# EAGLE board main_board (EAGLE 9.6.2)
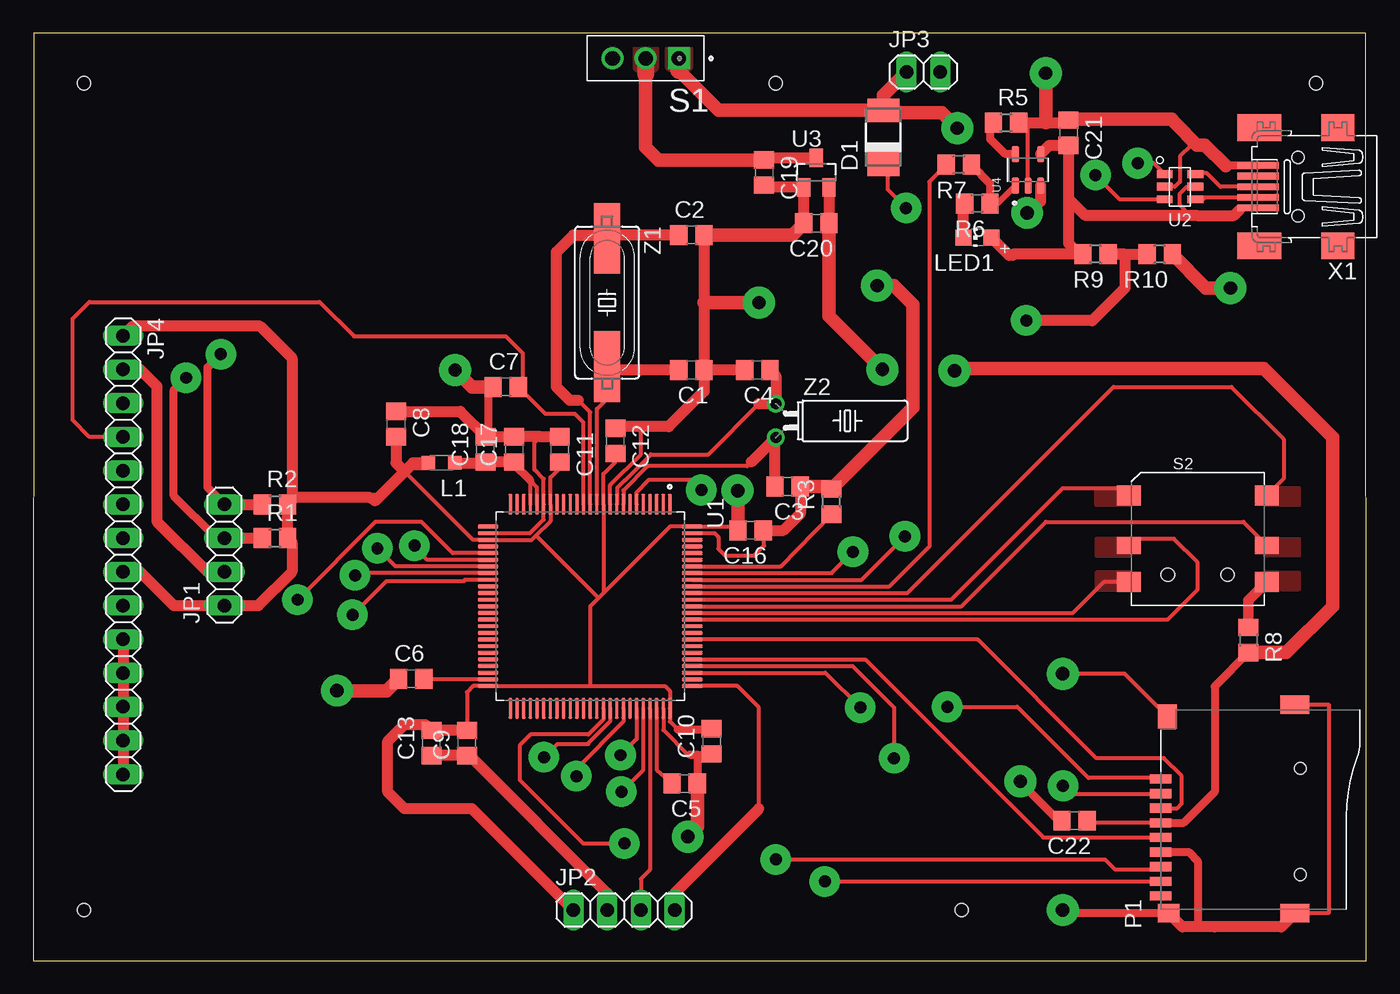
[diagram p0: board, top side]
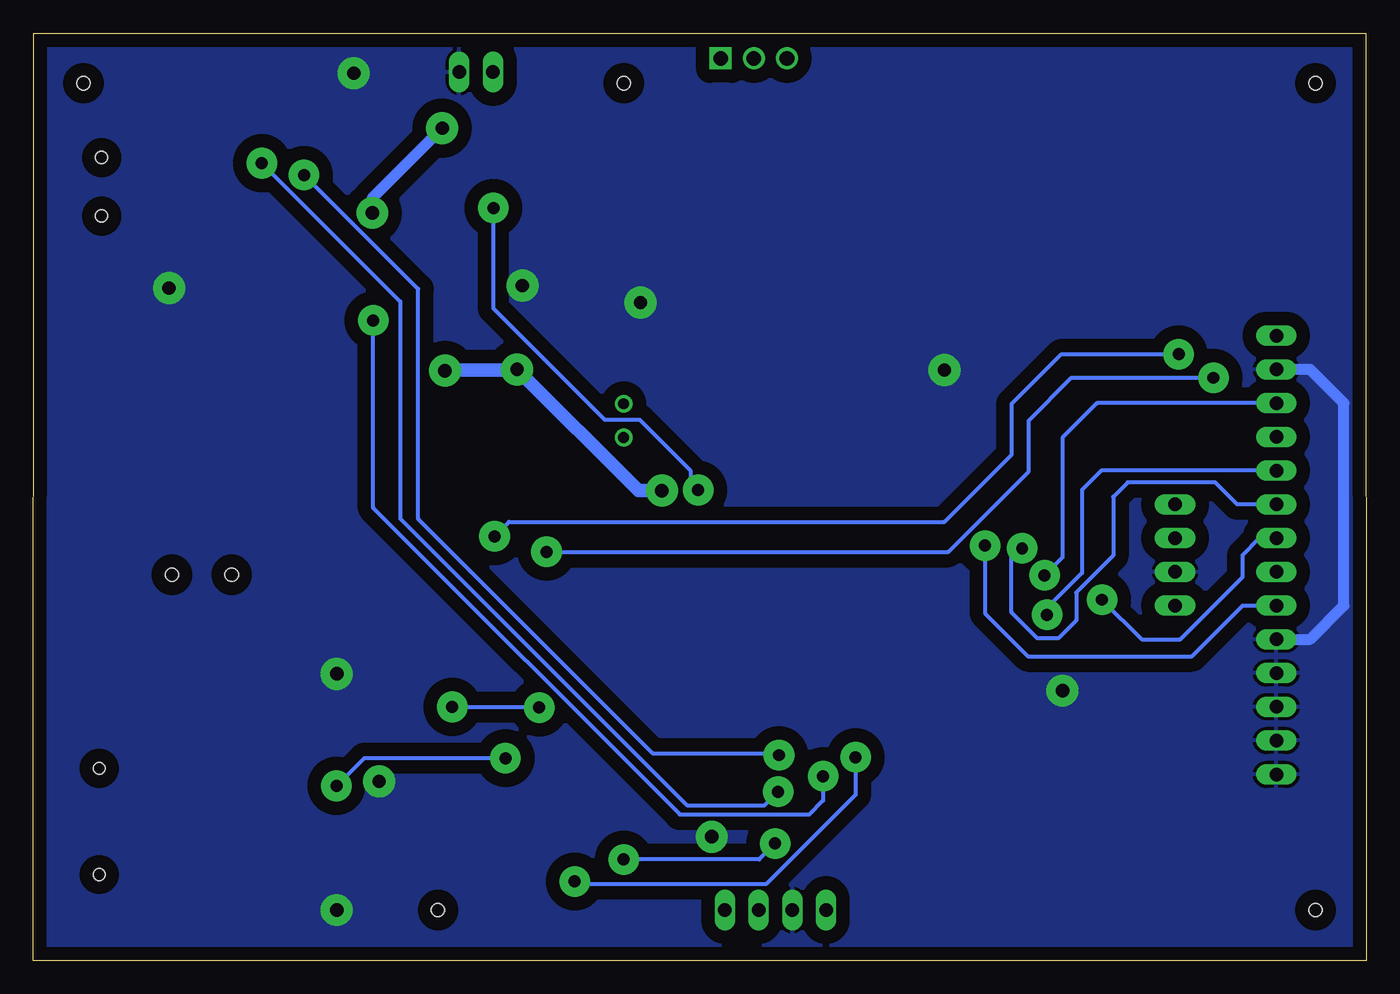
[diagram p1: board, bottom side, seen from below]

Size 100.31 x 69.8 mm. Coordinates in mm from the lower left corner, seen from the top.
Outline: 0,0 100.31,0 100.26,69.8 0.04,69.79 0,0
Copper layers (1*16): Top 0.035mm / dielectric 1.5mm / Bottom 0.035mm
Design rules "default *": minimum track width 6mil, minimum drill 0.35mm, track to track 6mil, track to pad 6mil, pad to pad 6mil, via to via 6mil, smd to smd 6mil, copper to edge 40mil, drill to drill 6mil, minimum pad ring 10mil, minimum via ring 0.7mm, stop-mask expansion 4mil, vias tented up to drill 0mil, thermal gap 10mil
Net classes: 0 default: width 0.3 mm, drill 0.9 mm; 1 power: width 0.3 mm, drill 1 mm
Holes 1 mm at 3.81,66.04 3.81,3.81 96.52,66.04 69.85,3.81 55.88,66.04

## Footprints (pad centres in the part's own frame; a part is rotated, then mirrored left to right if it is on the bottom)
C0805 = smd 1.3 x 1.5: 1 -0.95,0; 2 0.95,0
DO-214AC = smd 1.8 x 2.4: A 2.025,0; C -2.025,0
1X04 = drill 1.016 long: 1 -3.81,0; 2 -1.27,0; 3 1.27,0; 4 3.81,0
1X02 = drill 1.016 long: 1 -1.27,0; 2 1.27,0
1X14 = drill 1.016 long: 1 -16.51,0; 2 -13.97,0; 3 -11.43,0; 4 -8.89,0; 5 -6.35,0; 6 -3.81,0; 7 -1.27,0; 8 1.27,0; 9 3.81,0; 10 6.35,0; 11 8.89,0; 12 11.43,0; 13 13.97,0; 14 16.51,0
L2012C = smd 1 x 1: 1 -1,0; 2 1,0
CHIP-LED0805 = smd 1.2 x 1.2: A 0,-1.05; C 0,1.05
SUNTECH_ST-TF-003A = smd 0.7 x 1.6: 1 3.52,5.33; 2 2.42,5.33; 3 1.32,5.33; 4 0.22,5.33; 5 -0.88,5.33; 6 -1.98,5.33; 7 -3.08,5.33; 8 -4.18,5.33; 9 -5.28,5.33 | smd 1.4 x 1.6: G1 -6.58,4.73 | smd 1.4 x 2.2: G2 -6.58,-4.77; G3 9.12,-4.77 | smd 1.8 x 1.4: G4 8.22,4.83 | hole 0.9: -3.68,-5.17; 4.32,-5.17
R0805 = smd 1.3 x 1.5: 1 -0.95,0; 2 0.95,0
SW_SSA12G = drill 1.1 square: 1 -2.5,0 | drill 1.1: 2 0,0; 3 2.5,0
SW6-3.25-10X10X8.6MM = smd 1.8 x 1.5: 1 -5.2,3.25; 3 -5.2,-3.25; 4 5.2,-3.25; 6 5.2,3.25 | smd 1.8 x 1.3: 2 -5.2,-0.5; 5 5.2,-0.5 | hole 1: -2.25,-2.7; 2.25,-2.7
QFP50P1600X1600X160-100N = smd 1.56 x 0.28: 1 -7.68,6; 2 -7.68,5.5; 3 -7.68,5; 4 -7.68,4.5; 5 -7.68,4; 6 -7.68,3.5; 7 -7.68,3; 8 -7.68,2.5; 9 -7.68,2; 10 -7.68,1.5; 11 -7.68,1; 12 -7.68,0.5; 13 -7.68,0; 14 -7.68,-0.5; 15 -7.68,-1; 16 -7.68,-1.5; 17 -7.68,-2; 18 -7.68,-2.5; 19 -7.68,-3; 20 -7.68,-3.5; 21 -7.68,-4; 22 -7.68,-4.5; 23 -7.68,-5; 24 -7.68,-5.5; 25 -7.68,-6; 51 7.68,-6; 52 7.68,-5.5; 53 7.68,-5; 54 7.68,-4.5; 55 7.68,-4; 56 7.68,-3.5; 57 7.68,-3; 58 7.68,-2.5; 59 7.68,-2; 60 7.68,-1.5; 61 7.68,-1; 62 7.68,-0.5; 63 7.68,0; 64 7.68,0.5; 65 7.68,1; 66 7.68,1.5; 67 7.68,2; 68 7.68,2.5; 69 7.68,3; 70 7.68,3.5; 71 7.68,4; 72 7.68,4.5; 73 7.68,5; 74 7.68,5.5; 75 7.68,6 | smd 0.28 x 1.56: 26 -6,-7.68; 27 -5.5,-7.68; 28 -5,-7.68; 29 -4.5,-7.68; 30 -4,-7.68; 31 -3.5,-7.68; 32 -3,-7.68; 33 -2.5,-7.68; 34 -2,-7.68; 35 -1.5,-7.68; 36 -1,-7.68; 37 -0.5,-7.68; 38 0,-7.68; 39 0.5,-7.68; 40 1,-7.68; 41 1.5,-7.68; 42 2,-7.68; 43 2.5,-7.68; 44 3,-7.68; 45 3.5,-7.68; 46 4,-7.68; 47 4.5,-7.68; 48 5,-7.68; 49 5.5,-7.68; 50 6,-7.68; 76 6,7.68; 77 5.5,7.68; 78 5,7.68; 79 4.5,7.68; 80 4,7.68; 81 3.5,7.68; 82 3,7.68; 83 2.5,7.68; 84 2,7.68; 85 1.5,7.68; 86 1,7.68; 87 0.5,7.68; 88 0,7.68; 89 -0.5,7.68; 90 -1,7.68; 91 -1.5,7.68; 92 -2,7.68; 93 -2.5,7.68; 94 -3,7.68; 95 -3.5,7.68; 96 -4,7.68; 97 -4.5,7.68; 98 -5,7.68; 99 -5.5,7.68; 100 -6,7.68
SOT-23-6L = smd 0.6 x 1.2: P$1 -0.95,-1.15; P$2 0,-1.15; P$3 0.95,-1.15; P$4 0.95,1.15; P$5 0,1.15; P$6 -0.95,1.15
SOT23 = smd 1 x 1.4: 1 -0.95,-1.1; 2 0.95,-1.1; 3 0,1.1
SOT95P280X100-5N = smd 1.24 x 0.55: 1 -1.185,0.95; 2 -1.185,0; 3 -1.185,-0.95; 4 1.185,-0.95; 5 1.185,0.95
32005-201 = smd 3.1 x 0.5: 1 3,1.6; 2 3,0.8; 3 3,0; 4 3,-0.8; 5 3,-1.6 | smd 2.5 x 2: M1 -3,-4.45; M2 -3,4.45 | smd 3.3 x 2: M3 2.9,4.45; M4 2.9,-4.45 | hole 0.9: 0,2.2; 0,-2.2
HC49UP = smd 5.334 x 1.93: 1 -4.826,0; 2 4.826,0
TC38H = drill 0.813: 1 -1.27,0; 2 1.27,0

## Placement (x,y rotation side)
C1  20p  [C0805]  49.53,44.45 180 top
C2  20p  [C0805]  49.53,54.61 0 top
C3  10p  [C0805]  56.77,35.69 180 top
C4  10p  [C0805]  54.48,44.45 180 top
C5  2.2u  [C0805]  49.02,13.34 180 top
C6  2.2u  [C0805]  28.45,21.21 0 top
C7  100n  [C0805]  35.56,43.18 0 top
C8  100n  [C0805]  27.3,40.39 270 top
C9  100n  [C0805]  32.64,16.38 90 top
C10  100n  [C0805]  51.05,16.51 90 top
C11  100n  [C0805]  39.62,38.48 270 top
C12  100n  [C0805]  43.81,39.12 270 top
C13  1u  [C0805]  29.97,16.38 90 top
C16  100n  [C0805]  53.98,32.38 180 top
C17  100n  [C0805]  36.2,38.48 90 top
C18  1u  [C0805]  34.04,38.48 90 top
C19  1u  [C0805]  54.99,59.31 270 top
C20  1u  [C0805]  58.93,55.5 180 top
C21  1u  [C0805]  77.9,62.31 270 top
C22  100n  [C0805]  78.36,10.54 180 top
D1  RS1M  [DO-214AC]  63.97,61.96 90 top
JP1  I2C  [1X04]  14.39,30.53 90 top
JP2  SWD  [1X04]  44.45,3.81 0 top
JP3  BAT  [1X02]  66.98,66.88 0 top
JP4  LCD  [1X14]  6.77,30.53 270 top
L1  10uH  [L2012C]  30.73,37.47 180 top
LED1  RED  [CHIP-LED0805]  71.04,54.43 90 top
P1  ST-TF-003A  [SUNTECH_ST-TF-003A]  90.17,10.16 90 top
R1  2.2k  [R0805]  18.2,31.8 0 top
R2  2.2k  [R0805]  18.2,34.34 0 top
R3  10k  [R0805]  60.07,34.54 90 top
R5  10k  [R0805]  73.2,63.07 0 top
R6  1k  [R0805]  71.04,56.97 180 top
R7  1k  [R0805]  69.65,59.89 180 top
R8  1k  [R0805]  91.44,24.13 270 top
R9  10k  [R0805]  79.93,53.16 180 top
R10  20k  [R0805]  84.76,53.16 180 top
S1  [SW_SSA12G]  46.09,67.91 180 top
S2  INT-1500M90B  [SW6-3.25-10X10X8.6MM]  87.63,31.75 0 top
U1  STM32F407VGT6  [QFP50P1600X1600X160-100N]  41.91,26.67 270 top
U2  USBLC6-2  [SOT-23-6L]  86.28,58.24 270 top
U3  MCP1700T-3302E  [SOT23]  58.93,59.31 0 top
U4  LTC4054LES5-4.2#TRPBF  [SOT95P280X100-5N]  74.85,59.51 90 top
X1  MicroUSB-B  [32005-201]  95.17,58.24 180 top
Z1  8MHz  [HC49UP]  43.18,49.53 270 top
Z2  32768  [TC38H]  55.88,40.64 270 top

## Library data of the parts
C1-C13 C16-C22 = rcl; SPICEPREFIX: C
D1 = diode
JP1-JP4 = pinhead
L1 = rcl; SPICEPREFIX: L
LED1 = adafruit
P1 = ST-TF-003A; AVAILABILITY: Not in stock; DESCRIPTION: Micro SD Card Socket; MF: Suntech; MP: ST-TF-003A; PACKAGE: None; PRICE: None
R1-R3 R5-R10 = rcl; SPICEPREFIX: R
S1 = SSA12G; AVAILABILITY: In Stock; COMMENT: 1-1437575-5; DESCRIPTION: 2 Position SPDT Extended Top Actuator Through Hole Vertical Mount Slide Switch; MF: TE Connectivity; MP: SSA12G; PACKAGE: None; PRICE: None
S2 = int-1500m90b; AVAILABILITY: Not in stock; DESCRIPTION: Switch Tactile Square Plunger J-Bend 0.05A 12VDC 3.14N SMD T/R; MF: ALPS; MP: SKQUDBE010; PACKAGE: None; PRICE: None
U1 = STM32F407VGT6; AVAILABILITY: In Stock; DESCRIPTION: ARM® Cortex®-M4 STM32F4 Microcontroller IC 32-Bit 168MHz 1MB (1M x 8) FLASH 100-LQFP (14x14); MF: STMicroelectronics; MP: STM32F407VGT6; PACKAGE: LQFP-100 STMicroelectronics; PRICE: None; PURCHASE-URL: https://pricing.snapeda.com/search/part/STM32F407VGT6/?ref=eda
U2 = USBLC6-2; AVAILABILITY: In Stock; DESCRIPTION: 17V Clamp 5A (8/20µs) Ipp Tvs Diode Surface Mount SOT-23-6; MF: STMicroelectronics; MP: USBLC6-2; PACKAGE: SOT-563 STMicroelectronics; PRICE: None; PURCHASE-URL: https://pricing.snapeda.com/search/part/USBLC6-2/?ref=eda
U3 = linear
U4 = LTC4054LES5-4.2_TRPBF; AVAILABILITY: In Stock; DESCRIPTION: Battery Charger Li-Ion 10mA to 150mA 4.2V 5-Pin TSOT-23 T/R; MF: Analog Devices; MP: LTC4054LES5-4.2#TRPBF; PACKAGE: SOT-5 Analog Devices; PRICE: None; PURCHASE-URL: https://pricing.snapeda.com/search/part/LTC4054LES5-4.2#TRPBF/?ref=eda
X1 = con-cypressindustries; OC_FARNELL: unknown; OC_NEWARK: unknown
Z1 Z2 = crystal; OC_FARNELL: unknown; OC_NEWARK: unknown

## Nets
+5V [power]: C21.2 LED1.A R9.2 U2.P$5 U4.4 X1.1
BOOT0: R3.1 U1.94
BTN_0: S2.6 U1.90
BTN_1: S2.1 U1.89
BTN_2: S2.5 U1.88
BTN_3: S2.3 U1.87
BTN_4: S2.2 U1.86
BTN_COM: R8.1 S2.4
D+: U2.P$6 X1.3
D+_PROT: U1.71 U2.P$1
D-: U2.P$4 X1.2
D-_INT: U1.70 U2.P$3
GND [power]: C1.1 C2.2 C3.1 C4.2 C5.1 C6.1 C7.1 C8.1 C9.1 C10.1 C11.1 C12.1 C13.1 C16.1 C17.2 C18.2 C19.2 C20.2 C21.1 C22.2 JP1.2 JP2.2 JP3.2 JP4.2 JP4.10 JP4.11 JP4.12 JP4.13 JP4.14 P1.6 P1.G1 P1.G2 P1.G3 P1.G4 R3.2 R5.2 R10.1 U1.10 U1.20 U1.27 U1.74 U1.99 U2.P$2 U3.1 U4.2 X1.5
I2C_SCL: JP1.4 R2.1 U1.92
I2C_SDA: JP1.3 R1.1 U1.93
LCD_CS: JP4.3 U1.33
LCD_DC: JP4.5 U1.34
LCD_MISO: JP4.9 U1.31
LCD_MOSI: JP4.6 U1.32
LCD_SCK: JP4.7 U1.30
N$1: C1.2 U1.12 Z1.2
N$2: C2.1 U1.13 Z1.1
N$3: C4.1 U1.9 Z2.1
N$5: C6.2 U1.49
N$6: C5.2 U1.73
N$7: C19.1 S1.2 U3.3
N$8: R6.1 R7.1 U4.1
N$9: LED1.C R6.2
N$10: D1.C U1.6
N$11: C3.2 U1.8 Z2.2
NCHRG: R7.2 U1.91
NRST: C7.2 JP4.4 U1.14
PROG: R5.1 U4.5
SD_CLK: P1.5 U1.80
SD_CMD: P1.3 U1.83
SD_DAT0: P1.7 U1.65
SD_DAT1: P1.8 U1.66
SD_DAT2: P1.1 U1.78
SD_DAT3: P1.2 U1.79
SWCLK: JP2.4 U1.76
SWDIO: JP2.3 U1.72
VBAT+ [power]: D1.A JP3.1 S1.1 U4.3
VBUS: R9.1 R10.2 U1.68
VDD [power]: C8.2 C9.2 C10.2 C11.2 C12.2 C13.2 C16.2 C20.1 C22.1 JP1.1 JP2.1 JP4.1 JP4.8 L1.2 P1.4 R1.2 R2.2 R8.2 U1.11 U1.19 U1.28 U1.50 U1.75 U1.100 U3.2
VDDA [power]: C17.1 C18.1 L1.1 U1.21 U1.22

## Tracks (layer width: path | path; a pad name or v marks a point on that pad's centre or on a via)
+5V
  Top 0.3: 87.05,56.08 86.28,56.84 86.28,57.73 86.79,58.24 U2.P$5 | X1.1 92.05,56.52 90.78,56.52
  Top 0.61: 87.05,56.08 87.55,56.08 | 73.43,53.1 73.69,53.1 74.79,53.1
  Top 0.813: U4.4 76.46,61.36 C21.2 77.9,57.35 | 90.78,56.52 90.35,56.08 87.55,56.08 79.17,56.08 77.9,57.35 | LED1.A 73.43,53.1 | R9.2 78.74,53.16 | 78.74,53.16 73.7,53.16 73.69,53.1 | 77.9,57.35 77.9,54 78.74,53.16
BOOT0
  Top 0.3: U1.94 56.25,29.67 R3.1
BTN_0
  Top 0.3: U1.90 65.77,27.67 81.28,43.18 90.17,43.18 94.1,39.25 94.1,36.27 S2.6
  pour Top (no thermals): 92.71,35.56 95.25,35.56 95.25,34.29 92.71,34.29
BTN_1
  Top 0.3: U1.89 69.08,27.17 77.47,35.56 81.87,35.56 S2.1
  pour Top (no thermals): 82.55,34.29 80.01,34.29 80.01,35.56 82.55,35.56
BTN_2
  Top 0.3: U1.88 69.85,26.67 76.2,33.02 91.06,33.02 S2.5
  pour Top (no thermals): 92.71,31.75 95.25,31.75 95.25,30.48 92.71,30.48
BTN_3
  Top 0.3: U1.87 78.24,26.17 80.57,28.5 S2.3
  pour Top (no thermals): 82.55,29.21 80.01,29.21 80.01,27.94 82.55,27.94
BTN_4
  Top 0.3: U1.86 85.36,25.67 87.63,27.94 87.63,29.96 85.84,31.75 82.93,31.75 S2.2
  pour Top (no thermals): 82.55,31.75 80.01,31.75 80.01,30.48 82.55,30.48
BTN_COM
  Top 0.8: S2.4 91.44,27.11 R8.1
  pour Top (no thermals): 92.71,29.21 95.25,29.21 95.25,27.94 92.71,27.94
D+
  Top 0.3: X1.3 89.33,58.24 88.32,59.26 87.5,59.26 U2.P$6
D+_PROT  (via drill 0.9)
  Top 0.3: U2.P$1 84.31,60.02 v83.11,60.02 | v44.26,12.71 45.91,14.36 U1.71
  Bottom 0.3: v83.11,60.02 72.69,49.61 72.69,33.27 51.12,11.7 45.27,11.7 v44.26,12.71
D-
  Top 0.3: X1.2 88.15,57.44 88,57.29 U2.P$4
D-_INT  (via drill 0.9)
  Top 0.3: U1.70 45.41,16.68 v44.2,15.47 | U2.P$3 81.77,57.29 v79.93,59.13
  Bottom 0.3: v44.2,15.47 44.33,15.6 53.7,15.6 71.35,33.25 71.35,50.55 v79.93,59.13
DMMY_0
  pour Top (no thermals): 44.28,68.58 42.93,68.58 42.93,67.31 44.28,67.31
GND  (via drill 1)
  Top 0.3: 38.16,39.43 37.72,38.99 37.72,36.96 38.41,36.27 U1.20 38.41,33.2 37.38,32.17 U1.27 | U1.10 43.41,35.79 45.72,38.1 45.72,40.13 45.66,40.19 | C12.1 43.94,40.19 | U1.99 51.27,32.17 51.56,31.88 51.56,30.99 52.07,30.48 54.23,30.48 54.99,31.24 54.99,32.32 C16.1 | U1.74 47.41,17.36 49.28,15.49 49.4,15.49 | 50.99,15.49 C10.1 | 55.14,58.21 C19.2 | R5.2 74.85,63.07 U4.2 | 77.71,63.07 C21.1 77.97,63.32 | 87.14,61.39 86.28,60.53 86.28,58.62 85.9,58.24 U2.P$2 | 85.89,63.05 85.89,63.09 85.66,63.32 | 34.23,39.62 C18.2 | P1.G3 97.48,19.28 97.48,3.58 P1.G2 | 59.88,35.69 R3.2 | P1.G4 82.13,21.59 v77.47,21.59 | 87.63,2.54 88.9,2.54
  Top 0.61: 49.4,15.49 49.97,15.49 | 49.97,15.49 50.99,15.49 | 87.55,61.39 87.14,61.39 | X1.5 89.72,59.84 | C7.1 34.23,42.8 34.23,39.62 | 49.97,15.49 C5.1 | P1.6 86.94,8.18 87.63,7.49 87.63,2.54 | v77.47,3.81 77.7,3.58 P1.G1 | v74.28,13.5 74.28,13.44 77.18,10.54 C22.2
  Top 0.813: C11.1 38.16,39.43 C17.2 C18.2 32.13,41.34 C8.1 | C13.1 C9.1 32.83,15.43 43.18,5.08 JP2.2 | C1.1 50.48,42.86 47.81,40.19 45.66,40.19 43.94,40.19 | C2.2 50.48,49.53 C1.1 | C3.1 57.72,33.65 56.45,32.38 C16.1 | C4.2 C1.1 | 55.14,58.21 U3.1 C20.2 57.98,55.44 | R5.2 76.19,63.07 77.71,63.07 | JP4.10 JP4.11 JP4.14 | JP4.2 8.04,44.5 9.31,43.23 9.31,33.07 13.12,29.26 JP1.2 | P1.G1 86.48,2.54 88.9,2.54 93.9,2.54 P1.G2
  Top 1.016: 89.72,59.84 88.18,61.39 87.55,61.39 85.89,63.05 | 85.66,63.32 77.97,63.32 | 57.98,55.44 57.15,54.61 C2.2 | 50.48,49.53 v54.61,49.53 | C7.1 33.02,43.18 v31.75,44.45 | C6.1 26.61,20.32 v22.86,20.32 | C5.1 49.97,10.06 v49.25,9.34 | v90.09,50.62 88.25,50.62 R10.1 | 76.19,63.07 v76.19,66.79 | C3.1 59.88,35.69 | R3.2 66.19,41.62 66.19,49.38 64.77,50.8 v63.5,50.8
  Bottom 0.813: JP4.10 4.23,24.18 1.69,26.72 1.69,41.96 4.23,44.5 JP4.2
  pour Bottom (isolate 1.016): 0.08,69.79 0.08,0 100.13,0 100.13,69.79
I2C_SCL  (via drill 0.9)
  Top 0.3: U1.92 62.33,28.67 v65.6,31.94
  Top 0.61: JP1.4 13.12,35.61 13.12,44.64 v14.12,45.64
  Top 0.813: JP1.4 R2.1
  Bottom 0.3: v65.6,31.94 64.52,33.02 31.75,33.02 26.67,38.1 26.67,41.91 22.94,45.64 v14.12,45.64
I2C_SDA  (via drill 0.9)
  Top 0.3: U1.93 60.08,29.17 v61.68,30.77 | JP1.3 13.75,31.8
  Top 0.61: v11.49,43.87 10.58,42.95 10.58,34.98 13.75,31.8
  Top 0.813: JP1.3 R1.1
  Bottom 0.3: v61.68,30.77 31.46,30.77 25.4,36.83 25.4,40.64 22.17,43.87 v11.49,43.87
LCD_CS  (via drill 0.9)
  Top 0.3: v24.21,29.01 24.37,29.17 34.22,29.17 U1.33
  Bottom 0.3: JP4.3 20.27,41.96 22.86,39.37 22.86,30.35 v24.21,29.01
LCD_DC  (via drill 0.9)
  Top 0.3: v24.03,26.02 26.58,28.57 32.38,28.57 32.49,28.68 U1.34
  Bottom 0.3: JP4.5 19.94,36.88 21.39,35.43 21.39,29.17 24.03,26.53 v24.03,26.02
LCD_MISO  (via drill 0.9)
  Top 0.3: U1.31 29.65,30.17 28.63,31.18 v28.69,31.24
  Bottom 0.3: v28.69,31.24 28.69,26.15 25.45,22.91 13.12,22.91 9.31,26.72 JP4.9
LCD_MOSI  (via drill 0.9)
  Top 0.3: U1.32 27.25,29.67 v25.89,31.03
  Bottom 0.3: JP4.6 9.72,34.34 11.37,35.99 17.96,35.99 19.05,34.9 19.05,30.48 21.83,27.7 21.83,25.62 23.18,24.27 24.75,24.27 26.7,26.21 26.7,30.43 26.1,31.03 v25.89,31.03
LCD_SCK  (via drill 0.9)
  Top 0.3: U1.30 31.56,30.67 29.21,33.02 25.74,33.02 v19.89,27.16
  Bottom 0.3: v19.89,27.16 16.9,24.18 14.01,24.18 9.31,28.88 9.31,30.53 8.04,31.8 JP4.7
N$1
  Top 0.3: U1.12 42.41,41.52 43.43,42.55 43.43,44.45 Z1.2
  Top 0.813: C1.2 43.43,44.45
N$2
  Top 0.3: U1.13 41.91,41.27 41.02,42.16 | 42.93,54.61 Z1.1
  Top 0.813: 41.02,42.16 40.39,42.16 39.37,43.18 39.37,53.34 40.64,54.61 42.93,54.61 C2.1
N$3
  Top 0.3: U1.9 43.96,34.4 43.96,35.6 44.5,36.14 44.52,36.14 46.48,38.1 50.8,38.1 54.61,41.91 | C4.1 55.88,44
  Top 0.813: 54.61,41.91 Z2.1 55.88,44
N$5
  Top 0.3: U1.49 29.44,21.17 C6.2
N$6
  Top 0.3: U1.73 46.91,14.37 C5.2
N$7
  Top 0.3: 55.14,60.41 C19.1
  Top 0.813: U3.3 55.14,60.41
  Top 1.016: C19.1 47.06,60.26 46.08,61.24 46.08,66.73
  Top 1.27: S1.2 46.09,66.74 46.08,66.73
  pour Top (no thermals): 45.5,67.26 46.7,67.26 46.7,68.58 45.5,68.58
N$8
  Top 0.3: 72.55,56.97 R6.1
  Top 0.406: U4.1 72.55,56.97
  Top 0.61: R7.1 71.99,58.5 R6.1
N$9
  Top 0.3: 69.99,56.87 R6.2
  Top 0.813: LED1.C 69.99,56.87
N$10  (via drill 0.9)
  Top 0.3: U1.6 45.41,35.25 46.35,36.2 49.51,36.2 v50.28,35.42 | v65.68,56.64 64.28,58.05 64.28,59.63 D1.C
  Bottom 0.3: v50.28,35.42 50.86,36.01 50.86,36.89 54.66,40.69 57.3,40.69 65.68,49.08 v65.68,56.64
N$11
  Top 0.3: U1.8 44.41,35.39 46.23,37.21 53.72,37.21 54.04,37.53 55.82,39.31
  Top 0.813: 54.04,37.53 Z2.2 | C3.2 55.82,39.31
NCHRG
  Top 0.3: U1.91 64.44,28.17 67.43,31.16 67.43,58.62 R7.2
NRST
  Top 0.3: U1.14 41.41,40.51 40.77,41.15 38.54,41.15 C7.2 36.83,43.5 36.83,45.72 35.56,46.99 24.13,46.99 21.54,49.58 4.23,49.58 2.96,48.31 2.96,40.69 4.23,39.42 JP4.4
PROG
  Top 0.61: U4.5 73.16,60.7 72,61.86 72,62.81 R5.1
SD_CLK
  Top 0.3: U1.80 62.62,22.67 76.01,9.28 P1.5
SD_CMD
  Top 0.3: U1.83 71.08,24.17 80.01,15.24 85.09,15.24 86.42,13.91 86.42,11.82 86.08,11.48 P1.3 84.84,11.68
SD_DAT0  (via drill 0.9)
  Top 0.3: U1.65 42.91,18.15 41.78,17.02 37.43,17.02 36.6,16.19 36.6,13.6 41.38,8.83 v44.49,8.83 | v55.88,7.62 80.64,7.62 81.41,6.86 84.62,6.86 P1.7
  Bottom 0.3: v44.49,8.83 45.7,7.62 v55.88,7.62
SD_DAT1  (via drill 0.9)
  Top 0.3: U1.66 43.41,18.01 41.76,16.36 41.76,16.29 39.42,16.29 v38.43,15.3 | v59.56,5.97 84.83,5.97 P1.8
  Bottom 0.3: v38.43,15.3 38.43,12.5 45.13,5.8 59.4,5.8 v59.56,5.97
SD_DAT2  (via drill 0.9)
  Top 0.3: U1.78 59.61,21.67 v62.23,19.05 | v68.78,19.1 74.04,19.1 79.4,13.74 84.78,13.74 84.84,13.8 P1.1
  Bottom 0.3: v62.23,19.05 68.73,19.05 v68.78,19.1
SD_DAT3  (via drill 0.9)
  Top 0.3: U1.79 61.65,22.17 64.77,19.05 v64.77,15.24 | P1.2 84.77,12.51 78.13,12.51 v77.48,13.16
  Bottom 0.3: v64.77,15.24 75.4,15.24 v77.48,13.16
SWCLK
  Top 0.3: JP2.4 48.26,5.08 | 54.61,11.43 54.61,19.05 52.99,20.67 U1.76
  Top 0.813: 48.26,5.08 54.61,11.43
SWDIO
  Top 0.3: U1.72 46.41,6.85 45.72,6.16 JP2.3
VBAT+  (via drill 1)
  Top 0.3: 74.85,56.21 v74.79,56.27 | D1.A 63.79,63.8 63.5,63.8
  Top 0.813: U4.3 75.8,57.16 74.85,56.21
  Top 1.016: v69.53,62.65 68.38,63.8 63.5,63.8 63.18,63.8 | 48.59,66.98 51.58,63.99 D1.A 63.97,65.14 JP3.1
  Top 1.27: S1.1 48.59,66.98
  Bottom 0.813: v74.79,56.27 74.79,57.39 v69.53,62.65
  pour Top (no thermals): 47.94,67.28 47.94,68.63 49.24,68.63 49.24,67.28
VBUS  (via drill 0.9)
  Top 0.3: U1.68 44.41,18 40.87,14.45 v40.87,13.88
  Top 0.813: v74.73,48.18 74.75,48.16 79.69,48.16 82.15,50.62 82.15,53.16 R9.1 R10.2
  Bottom 0.3: v40.87,13.88 40.87,12.05 41.91,11.01 51.65,11.01 74.73,34.09 v74.73,48.18
VDD  (via drill 1)
  Top 0.3: C11.2 39.62,37.08 38.91,36.37 U1.19 38.91,33.07 37.85,32 | C12.2 43.81,37.53 42.91,36.63 U1.11 42.91,27.67 | C16.2 52.74,32.67 U1.100 47.91,32.67 42.91,27.67 | 48.51,17.4 47.91,18 U1.75 47.91,20.29 47.53,20.67 41.91,20.67 | 50.99,17.4 C10.2 | C9.2 32.64,20.19 33.12,20.67 U1.50 41.91,20.67 | 29.61,37.34 L1.2 | 19.47,31.48 R1.2 | 19.47,34.66 R2.2 | 29.52,17.78 C13.2 | 37.85,32 37.52,31.67 U1.28 33.1,31.67 27.94,36.83 | P1.4 79.47,10.38 C22.1 | 42.91,27.67 42.55,27.3 | 42.55,27.3 41.91,26.67 41.91,20.67 | 37.85,32 42.55,27.3 | 53.02,35.35 v53.01,35.37 | 25.4,34.8 25.53,34.8 25.72,34.61
  Top 0.61: 48.51,17.4 50.99,17.4 | P1.4 86.58,10.38 88.9,12.7 88.9,20.64 R8.2
  Top 0.813: C9.2 C13.2 | U3.2 C20.1 | 28.7,37.34 29.61,37.34 | JP4.8 8.04,29.26 10.58,26.72 JP1.1 16.93,26.72 19.47,29.26 19.47,31.48 | R1.2 R2.2 19.66,34.85 25.35,34.85 25.4,34.8 25.91,34.8 | JP4.1 7.48,47.75 17.07,47.75 19.47,45.35 19.47,34.66 | L1.2 28.57,37.47 27.94,36.83 | 25.72,34.61 27.94,36.83 | 29.52,17.78 27.94,17.78 26.67,16.51 26.67,12.7 27.94,11.43 33.02,11.43 JP2.1 40.45,4 | C8.2 27.3,37.47 27.94,36.83
  Top 1.016: R8.2 94.3,23.18 97.79,26.67 97.79,39.37 92.61,44.55 69.48,44.55 v69.33,44.4 | C16.2 53.02,35.35 | v63.91,44.5 59.88,48.53 C20.1
  Bottom 0.3: v69.33,44.4 69.33,44.45
  Bottom 1.016: v53.01,35.37 54.77,35.37 v63.91,44.5 63.96,44.45 69.33,44.45
VDDA
  Top 0.3: U1.22 37.41,36.12 37.91,35.62 U1.21 | 36.2,37.34 C17.1 | 33.97,37.47 C18.1
  Top 0.61: 37.41,36.12 36.2,37.34
  Top 0.813: C17.1 C18.1 | L1.1 33.97,37.47